# Altium PCB LED.PcbDoc
Units mm, origin at the board's own origin, x right, y up, seen from the top; angles counter-clockwise.
Board outline 17.78 x 17.78 mm, 2 copper layers (Top Layer, Bottom Layer), stack 1.671 mm thick; 5 components, 4 nets, 10 pads, 1 vias.
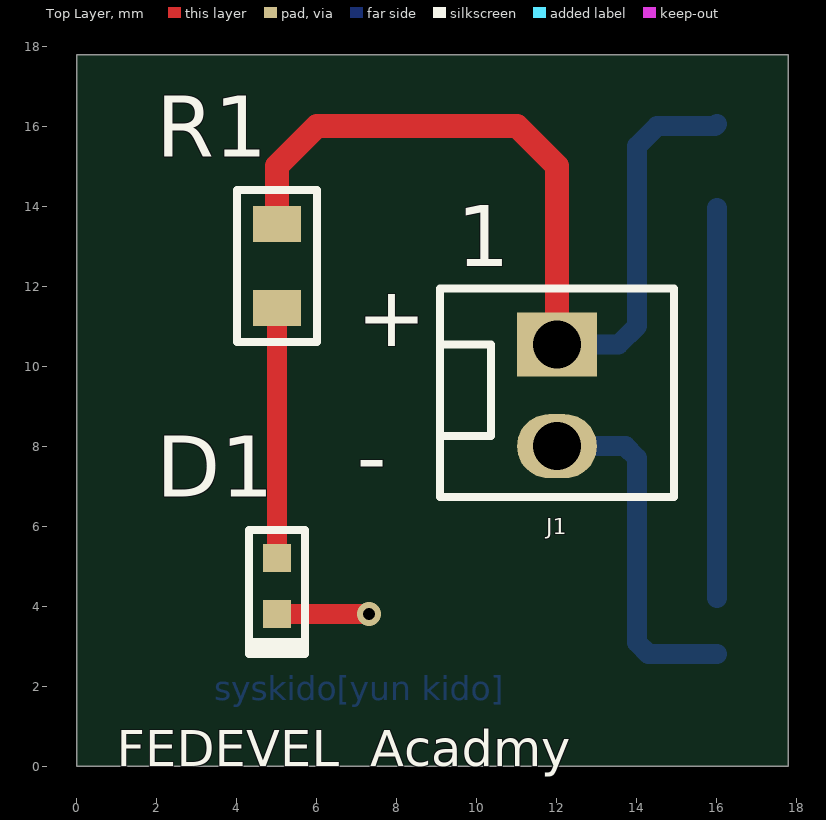
[diagram p0: Top Layer view]
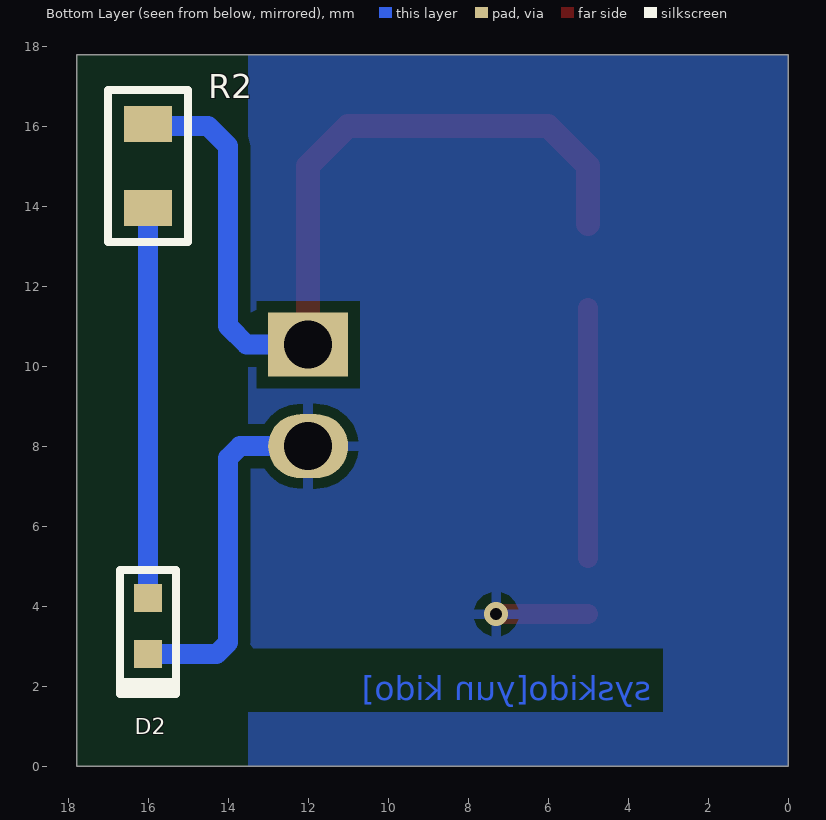
[diagram p1: Bottom Layer view, seen from below]
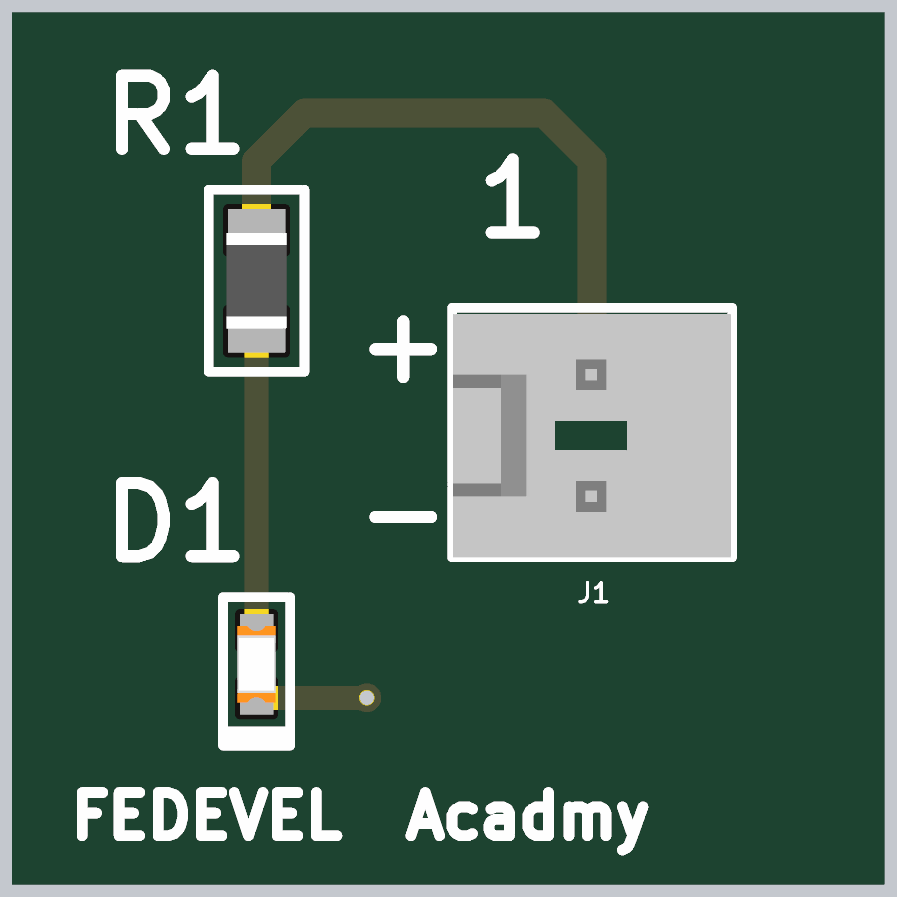
[diagram p2: 3D render of the assembled board from above, using the file's embedded part models]

## Layer stack, top to bottom
Top Solder: solder mask 0.0102, Solder Resist, Dk 3.5
Top Layer: signal copper 0.0356
Dielectric 1: dielectric 1.6, FR-4, Dk 4.8
Bottom Layer: signal copper 0.0356
Bottom Solder: solder mask 0.0102, Solder Resist, Dk 3.5

## Board outline
0,0 17.78,0 17.78,17.78 0,17.78

## Design rules (kind name [scope] priority, off if disabled: settings)
Clearance [All] p1: gap=0.3 ignorepadtopadclearanceinfootprint=FALSE
PolygonConnect [All] p1: connectstyle=Relief reliefconductorwidth=0.254 reliefentries=4 polygonreliefangle="90 Angle" airgapwidth=0.254
RoutingVias [All] p1: holewidth=0.3 width=0.6 viastyle="Through Hole" minholewidth=0.3 minwidth=0.6 maxholewidth=0.3 maxwidth=0.6
SilkToSolderMaskClearance [IsPad] p1: minsilkscreentomaskgap=0.1 clearancetoexposedcopper=TRUE
SolderMaskExpansion [All] p1: expansion=0.102 istentingtop=FALSE
Width [All] p1: maxlimit=1 minlimit=0.3 preferedwidth=0.5
29 further rules are at their usual default settings.

## Components (designator, comment, footprint, x,y, rotation, side; value= is the part's Value field where it differs from the comment)
D1 "GREEN" LED0603G 5,4.5 r90 top
D2 "GREEN" LED0603G 16,3.5 r90 bottom
J1 "1x2 Header" HDR1X2 12,10.54 r0 top
R1 "360R" R0805 5,12.5 r90 top
R2 "360R" R0805 16,15 r90 bottom

## Footprints (in the part's own frame and the unit in brackets; to place one, negate y for a bottom-side part, rotate by r counter-clockwise, add the part's x,y. Pads: shape width x height; smd on the part's side, far side on the other; paste and mask are expansions set on the pad)
HDR1X2 [mm]
  rect 2x1.6 hole 1.2: 1(0,0)
  oval 2x1.6 hole 1.2: 2(0,-2.54)
  silkscreen extent -2.92,-3.81 2.92,1.4, body extent -2.9,-3.81 2.9,1.27, height 11.71
LED0603G [mm]
  rect 0.7x0.7 smd: 1(-0.7,0) 2(0.7,0)
  silkscreen extent -1.7,-0.7 1.4,0.7, body extent -0.8,-0.4 0.8,0.4, height 0.59
R0805 [mm]
  rect 0.9x1.2 smd: 1(-1.05,0) 2(1.05,0)
  silkscreen extent -1.9,-1 1.9,1, body extent -1,-0.63 1,0.63, height 0.61

## Part data
D1 D2: library part LSM0603453V, "LED GREEN CLEAR CHIP 0603 SMD", Case Code (Imperial)=0603, Case Code (Metric)=1608, Color=Green, Forward Current=20mA, Forward Voltage=2V, Lens Color=Colorless, Manufacturer="Visual Communications", Max Operating Temperature=85°C, Min Operating Temperature=-40°C, Power Dissipation=60mW, Reverse Voltage=5V, Supplier Part Number=LSM0603453VDKR-ND, Case/Package=0603, Category=LEDs, ComponentLink1Description=http://www.farnell.com/datasheets/2699708.pdf?src-supplier=Farnell, ComponentLink1URL=http://www.farnell.com/datasheets/2699708.pdf?src-supplier=Farnell, ComponentLink2Description=http://www.farnell.com/datasheets/2699708.pdf?src-supplier=Newark, ComponentLink2URL=http://www.farnell.com/datasheets/2699708.pdf?src-supplier=Newark, ComponentLink3Description=https://vcclite.com/wp-content/uploads/wpallimport/files/files/LSM0603453V.pdf?src-supplier=Digikey, ComponentLink3URL=https://vcclite.com/wp-content/uploads/wpallimport/files/files/LSM0603453V.pdf?src-supplier=Digikey, Dominant Wavelength=572nm, Height=0.65mm, Length=1.6mm, Lens Size=0.8mm, Lens Style=Flat, Lens Transparency=Clear, Luminous Intensity=63mcd, Manufacturer Part Number=LSM0603453V, Mounting Technology="Surface Mount", Packaging="Cut Tape", Pricing="1=0.46, 10=0.283, 100=0.1626, 1000=0.12726, 2000=0.11666 (USD)", RoHS=Yes, RoHS Compliant=Yes, Series=LSM0603, Stock=92418, Supplier=Digikey, Test Current=20mA, Viewing Angle=120°, Wavelength=576nm, Width=0.8mm
J1: library part 22-27-2021, "CONN HEADER VERT 2POS 2.54MM", Current Rating=4A, Flammability Rating="UL94 V-0", Housing Color=Natural, Manufacturer=Molex, Package Quantity=24000, Supplier Part Number=WM4111-ND, Voltage Rating=500V, Voltage Rating (DC)=250V, Category="Headers and Wire Housings", Contact Gender=Male, Contact Material=Tin, Contact Plating=Tin, Contact Type=-, Gender=Male, Housing Material=Nylon, Lead Free="Lead Free", Manufacturer Part Number=22-27-2021, Material=Nylon, Number of Positions=2, Number of Rows=1, Packaging=Bulk, Pitch=2.54mm, Plating=154ConductorMaterial, Pricing="1=0.3, 10=0.245, 100=0.18, 3000=0.1309, 6000=0.12272, 12000=0.11044 (USD)", Reach SVHC Compliant=4187SVHC, RoHS=Yes, RoHS Compliant=Yes, Series=6410, Stock=86413, Supplier=Digikey, Termination="Through Hole", Weight=0.00769oz
R1 R2: library part AC0805FR-10360RL, "RES 360 OHM 1% 1/8W 0805", Case/Package=339Case, Manufacturer=Yageo, Supplier Part Number=13-AC0805FR-10360RLDKR-ND, Category="Chip SMD Resistors", Manufacturer Part Number=AC0805FR-10360RL, Packaging=10Packaging, Pricing="1=0.1, 10=0.031, 50=0.0198, 100=0.0166, 500=0.01152, 1000=0.00997, 5000=0.00736 (USD)", RoHS=Yes, RoHS Compliant=Yes, Supplier=Digikey

## Via types
v1: diameter 0.6, hole 0.3, Top Layer to Bottom Layer, tented both sides, 1 vias

## Nets (pads, with @x,y where several pads share a name; then routed paths per layer and width w, separated by ;. In a path a pad name is that pad's centre, name@x,y a point inside that pad or via, vN(x,y) a via of type N, cw(c..) or ccw(c..) an arc to the next point about the centre after c; other vN are vias at no path point)
+3V3: J1.1 R1.2 R2.2 | length 22.7
  Top Layer w0.6: R1.2 5,15 6,16 11,16 12,15 J1.1
  Bottom Layer w0.5: J1.1 13.54,10.54 14,11 14,15.5 14.5,16 15.95,16 R2.2
DIODE1: D1.2 R1.1 | length 6.2
  Top Layer w0.5: D1.2 R1.1
DIODE2: D2.2 R2.1 | length 9.7
  Bottom Layer w0.5: D2.2 R2.1
GND: D1.1 D2.1 J1.2 | length 11.2
  Top Layer w0.5: D1.1 v1(7.3,3.8)
  Bottom Layer w0.5: J1.2 13.707,8 14,7.707 14,3.093 14.293,2.8 D2.1

## Polygon pours and split planes (outlines as drawn)
GND on Bottom Layer "GND_L02_P000" (solid, pour order 0): 0,0 13.5,0 13.5,17.78 0,17.78

## Other copper
Bottom Layer:
  text "syskido[yun kido]" at 3.429,1.651 h0.6

## Silkscreen, mask and mechanical layers (free items; w line width, h text height)
Top Overlay:
  text "+" at 7,10.5 h1.52
  text "-" at 7,7 h1.52
  text "FEDEVEL  Acadmy" at 1,0 h0.9
Board:
  lines w0.2: 0,0 0,18 18,18 18,0 0,0

## Text inside footprints (layer, text, board x,y; h text height)
J1: Top Overlay "1" at 9.5,12.5 h1.52